# EAGLE board 6DoF IMU  (EAGLE 6.1)
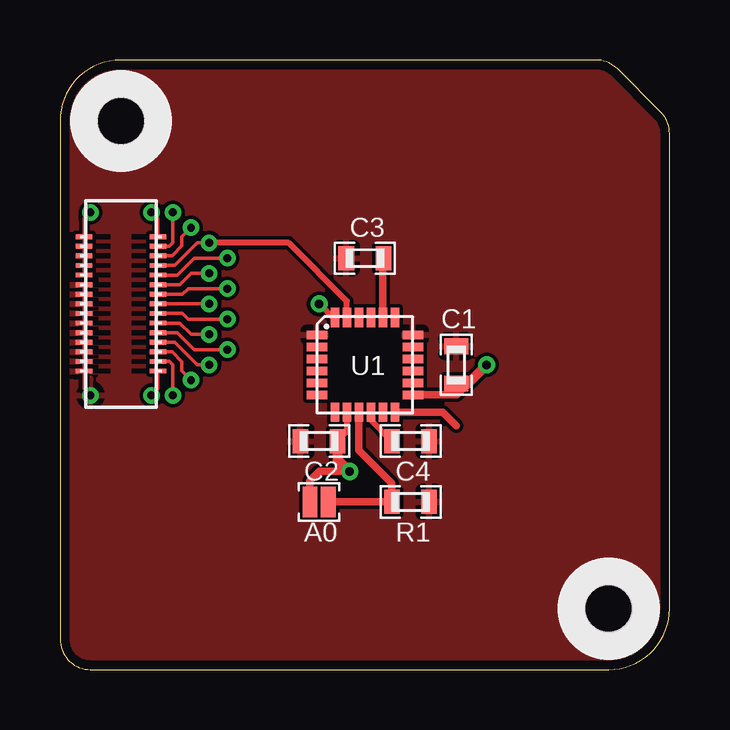
[diagram p0: board, top side]
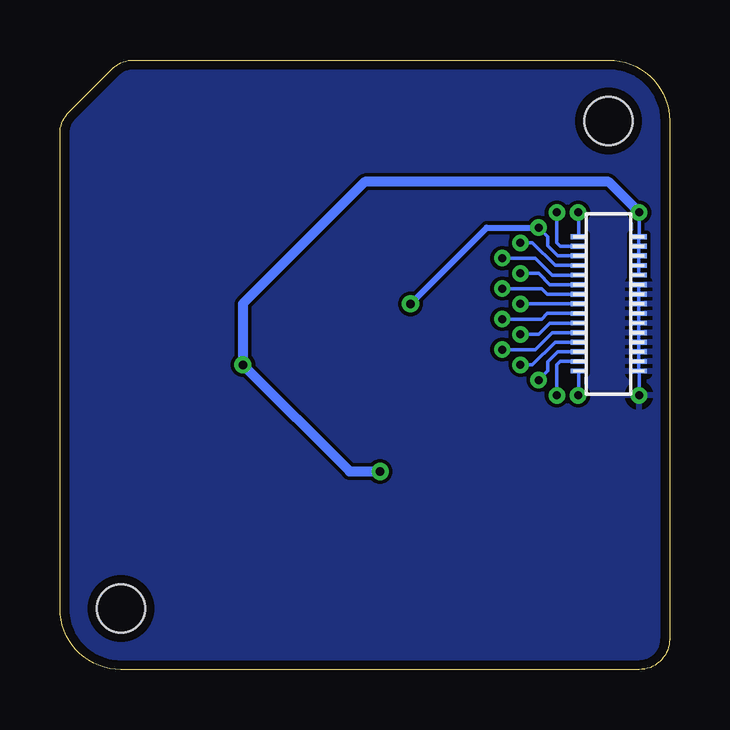
[diagram p1: board, bottom side, seen from below]

Size 25.4 x 25.4 mm. Coordinates in mm from the lower left corner, seen from the top.
Outline: 0,22.86 0,1.27 arc90 1.27,0 22.86,0 arc90 25.4,2.54 25.4,22.33 arc45 25.03,23.23 23.23,25.03 arc45 22.33,25.4 2.54,25.4 arc90 0,22.86
Copper layers (1*16): Top 0.0356mm / dielectric 1.5011mm / Bottom 0.0356mm
Design rules: minimum track width 6mil, minimum drill 13mil, track to track 6mil, track to pad 6mil, pad to pad 6mil, via to via 6mil, smd to smd 6mil, copper to edge 15mil, drill to drill 6mil, minimum pad ring 7mil, minimum via ring 7mil, stop-mask expansion 4mil, vias tented up to drill 16mil, thermal gap 10mil

## Footprints (pad centres in the part's own frame; a part is rotated, then mirrored left to right if it is on the bottom)
2.LRG = smd 0.61 x 1.27: 1 -0.381,0; 2 0.381,0
0603 = smd 0.65 x 1: 1 -0.775,0; 2 0.775,0
QFN = smd 0.85 x 0.35: 1 -2,1.25; 2 -2,0.75; 3 -2,0.25; 4 -2,-0.25; 5 -2,-0.75; 6 -2,-1.25; 13 2,-1.25; 14 2,-0.75; 15 2,-0.25; 16 2,0.25; 17 2,0.75; 18 2,1.25 | smd 0.35 x 0.8: 7 -1.25,-1.975; 8 -0.75,-1.975; 9 -0.25,-1.975; 10 0.25,-1.975; 11 0.75,-1.975; 12 1.25,-1.975; 19 1.25,1.975; 20 0.75,1.975; 21 0.25,1.975; 22 -0.25,1.975; 23 -0.75,1.975; 24 -1.25,1.975
2MM = hole 2: 0,0
ROOT1.BOTH = smd 0.7 x 0.2: 01 4.08,15.24; 02 4.08,14.84; 03 4.08,14.44; 3.3V@1 1,18.04; 3.3V@2 1,17.64; 3.3V@3 1,17.24; 3.3V@4 1,16.84; 3.3V@5 1,16.44; 04 4.08,14.04; 05 4.08,13.64; 06 4.08,13.24; 07 4.08,12.84; ADC0 4.08,18.04; ADC1 4.08,17.64; GND@1 1,16.04; GND@2 1,15.64; GND@3 1,15.24; GND@4 1,14.84; GND@5 1,14.44; GND@6 1,14.04; GND@7 1,13.64; GND@8 1,13.24; GND@9 1,12.84; GND@10 1,12.44; MISO 4.08,16.04; MOSI 4.08,16.44; SCL 4.08,16.84; SCLK 4.08,15.64; SDA 4.08,17.24; WAKE 4.08,12.44 | smd 0.66 x 0.2 bottom: 01@1 3.795,15.24; 02@1 3.795,14.84; 3.3V@6 1.285,16.44; 3.3V@7 1.285,16.84; 3.3V@8 1.285,17.24; 3.3V@9 1.285,17.64; 3.3V@10 1.285,18.04; 03@1 3.795,14.44; 04@1 3.795,14.04; 05@1 3.795,13.64; 06@1 3.795,13.24; 07@1 3.795,12.84; ADC0@1 3.795,18.04; ADC1@1 3.795,17.64; GND@11 1.285,12.44; GND@12 1.285,12.84; GND@13 1.285,13.24; GND@14 1.285,13.64; GND@15 1.285,14.04; GND@16 1.285,14.44; GND@17 1.285,14.84; GND@18 1.285,15.24; GND@19 1.285,15.64; GND@20 1.285,16.04; MISO@1 3.795,16.04; MOSI@1 3.795,16.44; SCL@1 3.795,16.84; SCLK@1 3.795,15.64; SDA@1 3.795,17.24; WAKE@1 3.795,12.44 | drill 0.33 pad 0.686: 01@VIA 6.215,15.24; 02@VIA 6.973,14.605; 3.3V@VIA 1.27,19.05; 03@VIA 6.215,13.97; 04@VIA 6.973,13.335; 05@VIA 6.215,12.7; 06@VIA 5.457,12.065; 07@VIA 4.699,11.43; ADC0@VIA 3.81,19.05; ADC1@VIA 4.699,19.05; GND@VIA 1.27,11.43; MISO@VIA 6.215,16.51; MOSI@VIA 6.973,17.145; SCL@VIA 6.215,17.78; SCLK@VIA 6.973,15.875; SDA@VIA 5.457,18.415; WAKE@VIA 3.81,11.43

## Placement (x,y rotation side)
A0  [2.LRG]  10.79,6.99 0 top
C1  .1uF  [0603]  16.51,12.7 270 top
C2  10nF  [0603]  10.79,9.53 180 top
C3  10nF  [0603]  12.7,17.14 0 top
C4  .1uF  [0603]  14.61,9.53 180 top
R1  [0603]  14.61,6.99 0 top
U1  MPU-6050  [QFN]  12.7,12.7 0 top
U$3  HOLE.2MM  [2MM]  22.86,2.54 90 top
U$4  HOLE.2MM  [2MM]  2.54,22.86 90 top
U$8  ROOT1.BOTH  [ROOT1.BOTH]  0,0 0 top

## Library data of the parts
A0 = .solderjumper
C1-C4 R1 = .standardparts
U1 = invensense
U$3 U$4 = .screw_holes
U$8 = thinkmaketest

## Nets
3.3V: A0.1 C1.2 C2.1 U1.8 U1.13 U$8.3.3V@1 U$8.3.3V@2 U$8.3.3V@3 U$8.3.3V@4 U$8.3.3V@5 U$8.3.3V@6 U$8.3.3V@7 U$8.3.3V@8 U$8.3.3V@9 U$8.3.3V@10 U$8.3.3V@VIA
GND: C1.1 C2.2 C3.1 C4.1 R1.2 U1.1 U1.18 U$8.GND@1 U$8.GND@2 U$8.GND@3 U$8.GND@4 U$8.GND@5 U$8.GND@6 U$8.GND@7 U$8.GND@8 U$8.GND@9 U$8.GND@10 U$8.GND@11 U$8.GND@12 U$8.GND@13 U$8.GND@14 U$8.GND@15 U$8.GND@16 U$8.GND@17 U$8.GND@18 U$8.GND@19 U$8.GND@20 U$8.GND@VIA
INT: U1.12
N$1: U$8.ADC0 U$8.ADC0@1 U$8.ADC0@VIA
N$2: U$8.ADC1 U$8.ADC1@1 U$8.ADC1@VIA
N$5: U$8.MOSI U$8.MOSI@1 U$8.MOSI@VIA
N$6: U$8.MISO U$8.MISO@1 U$8.MISO@VIA
N$7: U$8.SCLK U$8.SCLK@1 U$8.SCLK@VIA
N$16: C3.2 U1.20
N$18: A0.2 R1.1 U1.9
N$20: C4.2 U1.10
SCL: U1.23 U$8.SCL U$8.SCL@1 U$8.SCL@VIA
SDA: U1.24 U$8.SDA U$8.SDA@1 U$8.SDA@VIA

## Tracks (layer width: path | path; a pad name or v marks a point on that pad's centre or on a via)
3.3V  (via drill 0.36)
  Top 0.254: U1.8 11.95,9.9 C2.1
  Top 0.305: U1.13 16.53,11.45 17.14,12.06 | v12.06,8.26 10.79,8.26 10.41,7.87 A0.1
  Top 0.406: v12.06,8.26 11.57,8.75 C2.1 | C1.2 17,11.93 17.14,12.06 v17.78,12.7
  Bottom 0.406: U$8.3.3V@VIA 2.54,20.32 12.7,20.32 17.78,15.24 v17.78,12.7 13.34,8.26 v12.06,8.26
GND
  pour Bottom: 0,0 25.4,0 25.4,25.4 0,25.4
  pour Top: 0,0 25.4,0 25.4,25.4 0,25.4
INT
  Top 0.305: U1.12 15.95,10.72 16.51,10.16
N$16
  Top 0.305: U1.20 13.45,17.12 C3.2
N$18
  Top 0.305: U1.9 12.45,9.14 13.83,7.76 R1.1 A0.2
N$20
  Top 0.254: U1.10 12.95,10.4 C4.2
SCL
  Top 0.254: U1.23 11.95,15.36 9.53,17.78 U$8.SCL@VIA
SDA  (via drill 0.36)
  Top 0.254: U1.24 11.45,14.59 v10.79,15.24
  Bottom 0.254: v10.79,15.24 7.62,18.41 U$8.SDA@VIA

## Text on the board
tDocu: MPU6050 | 6DoF IMU | Addr: 110100 | * Create 8-1 SMD Jumper
bDocu: Cruz Monrreal II | InnovativeMaker.com